# Altium PCB MergeBoard2.PcbDoc
Units mil, origin at the board's own origin, x right, y up, seen from the top; angles counter-clockwise.
Board outline 2500 x 3000 mil, 4 copper layers (Top Layer, Internal Plane 2, InternalPlane1, Bottom Layer); 109 components, 67 nets, 354 pads, 48 vias.
Unrouted connection lines stored in the file: 86.
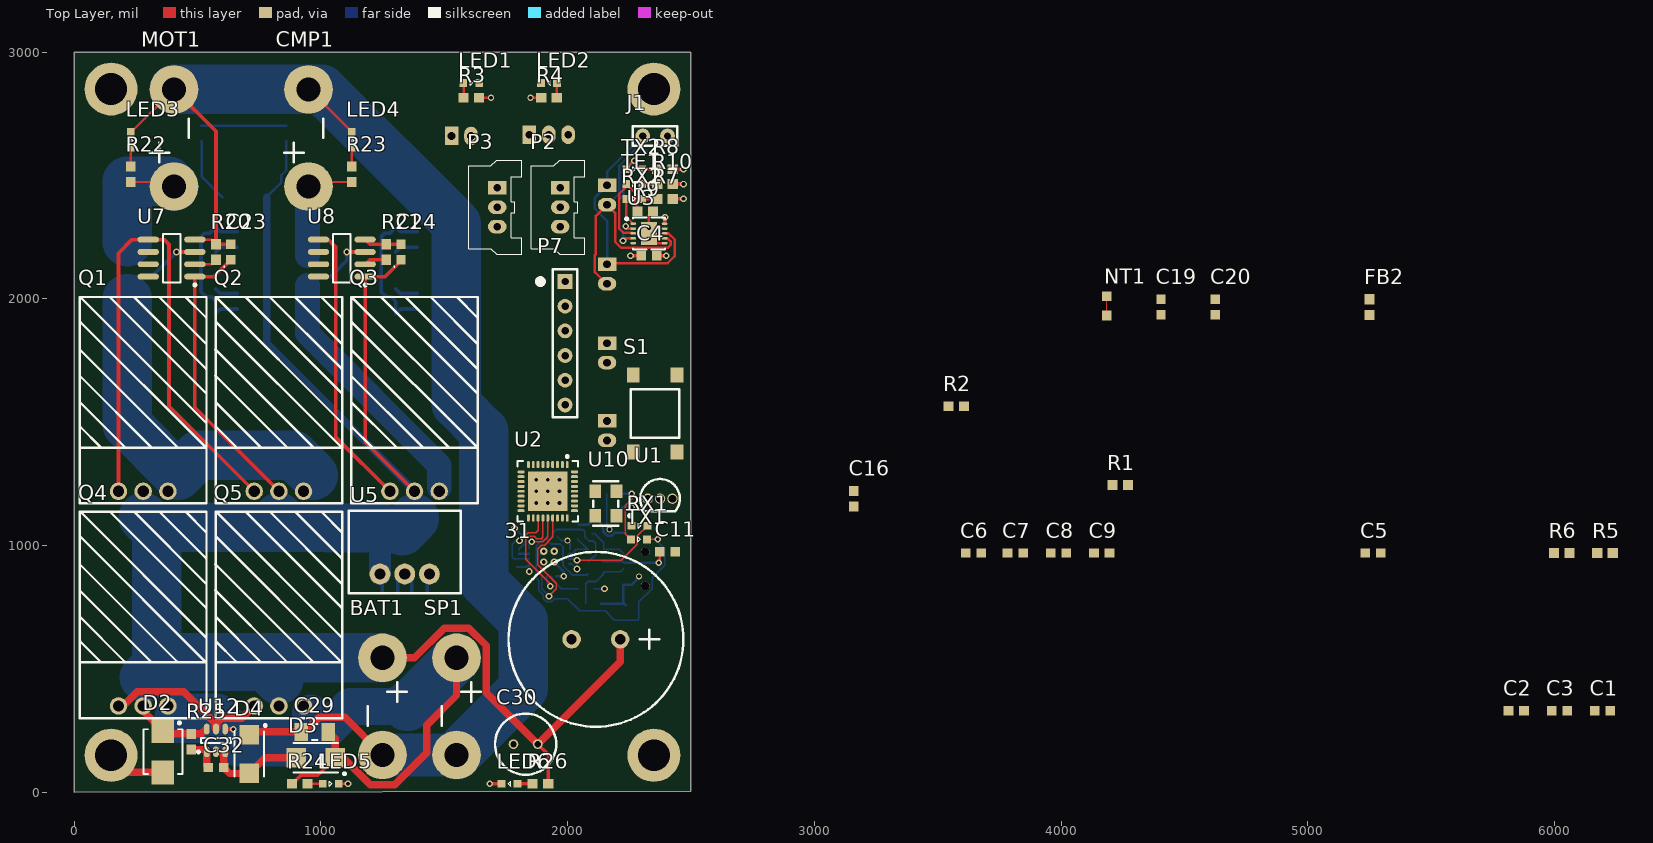
[diagram p0: Top Layer view]
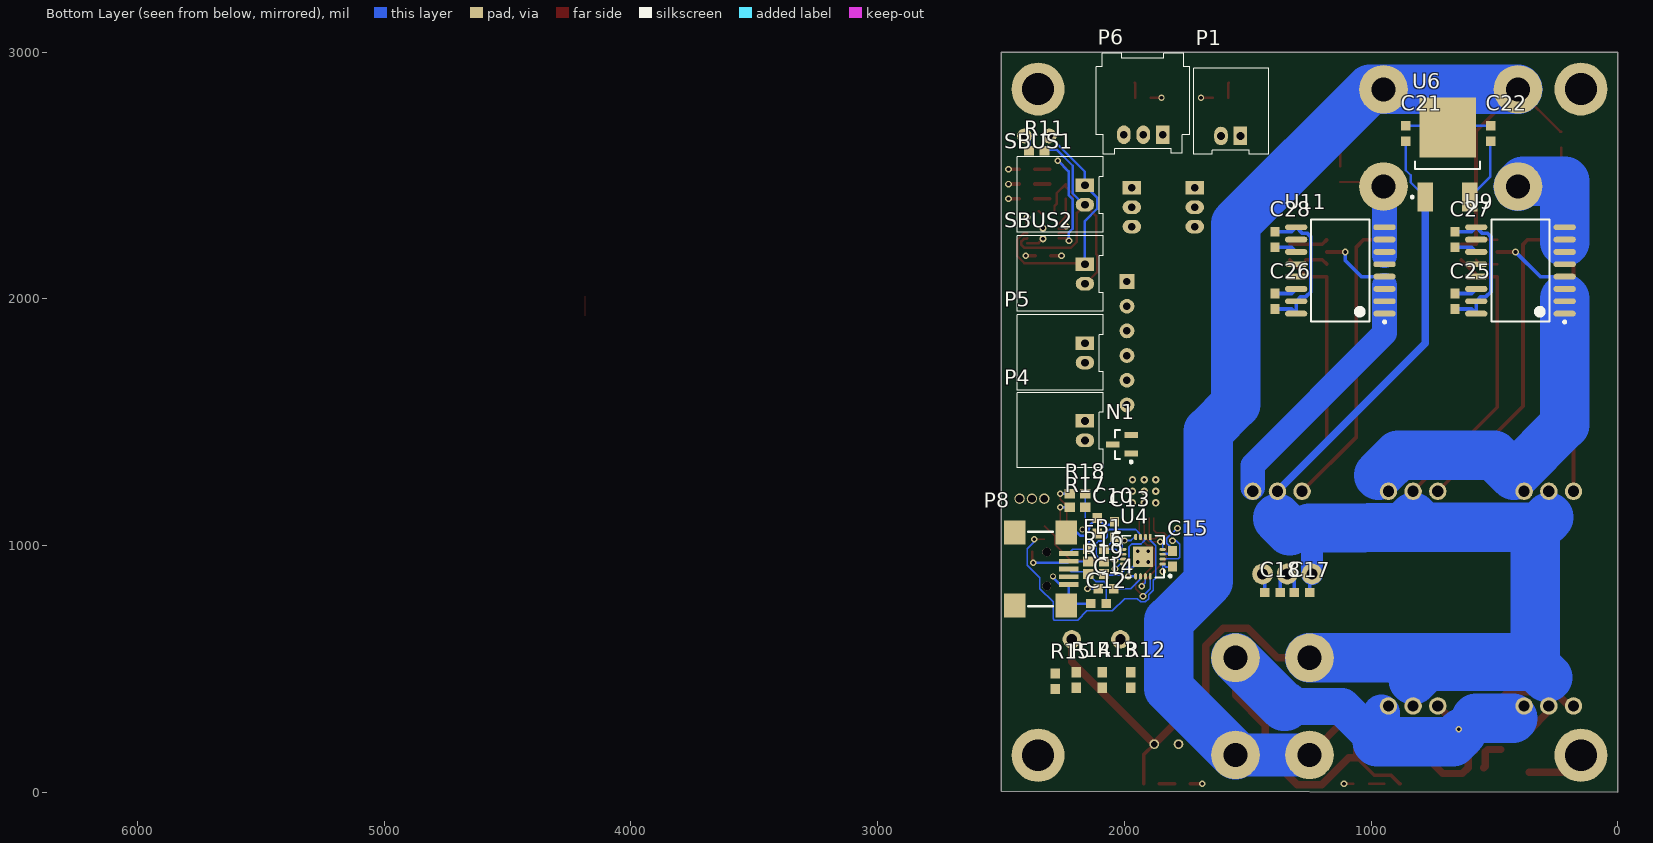
[diagram p1: Bottom Layer view, seen from below]
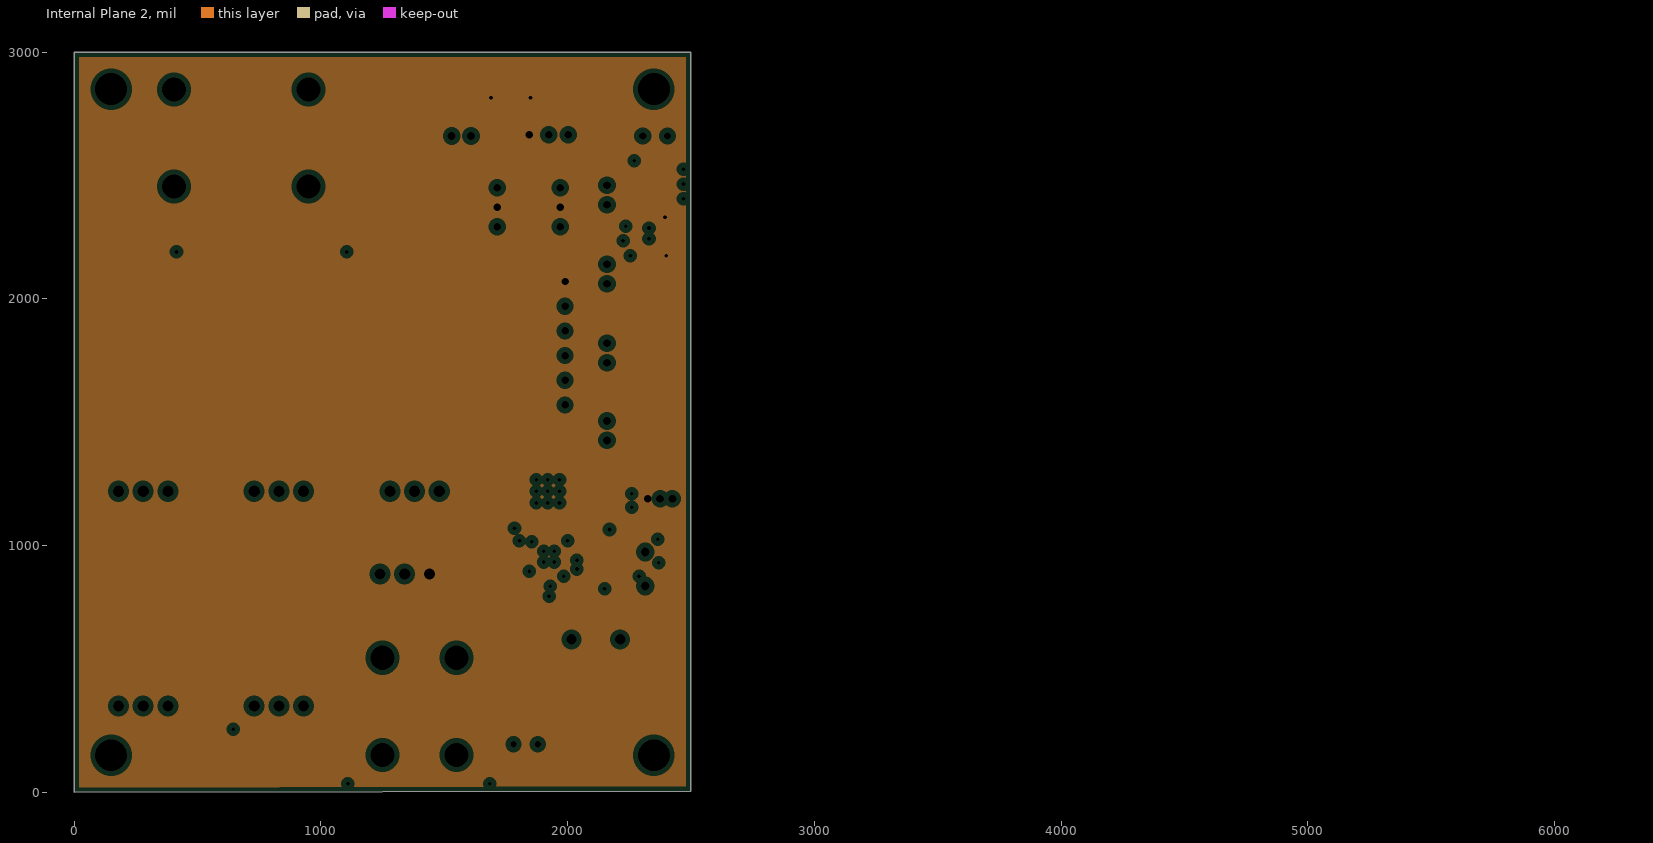
[diagram p2: Internal Plane 2, clearances drawn from the general rule]
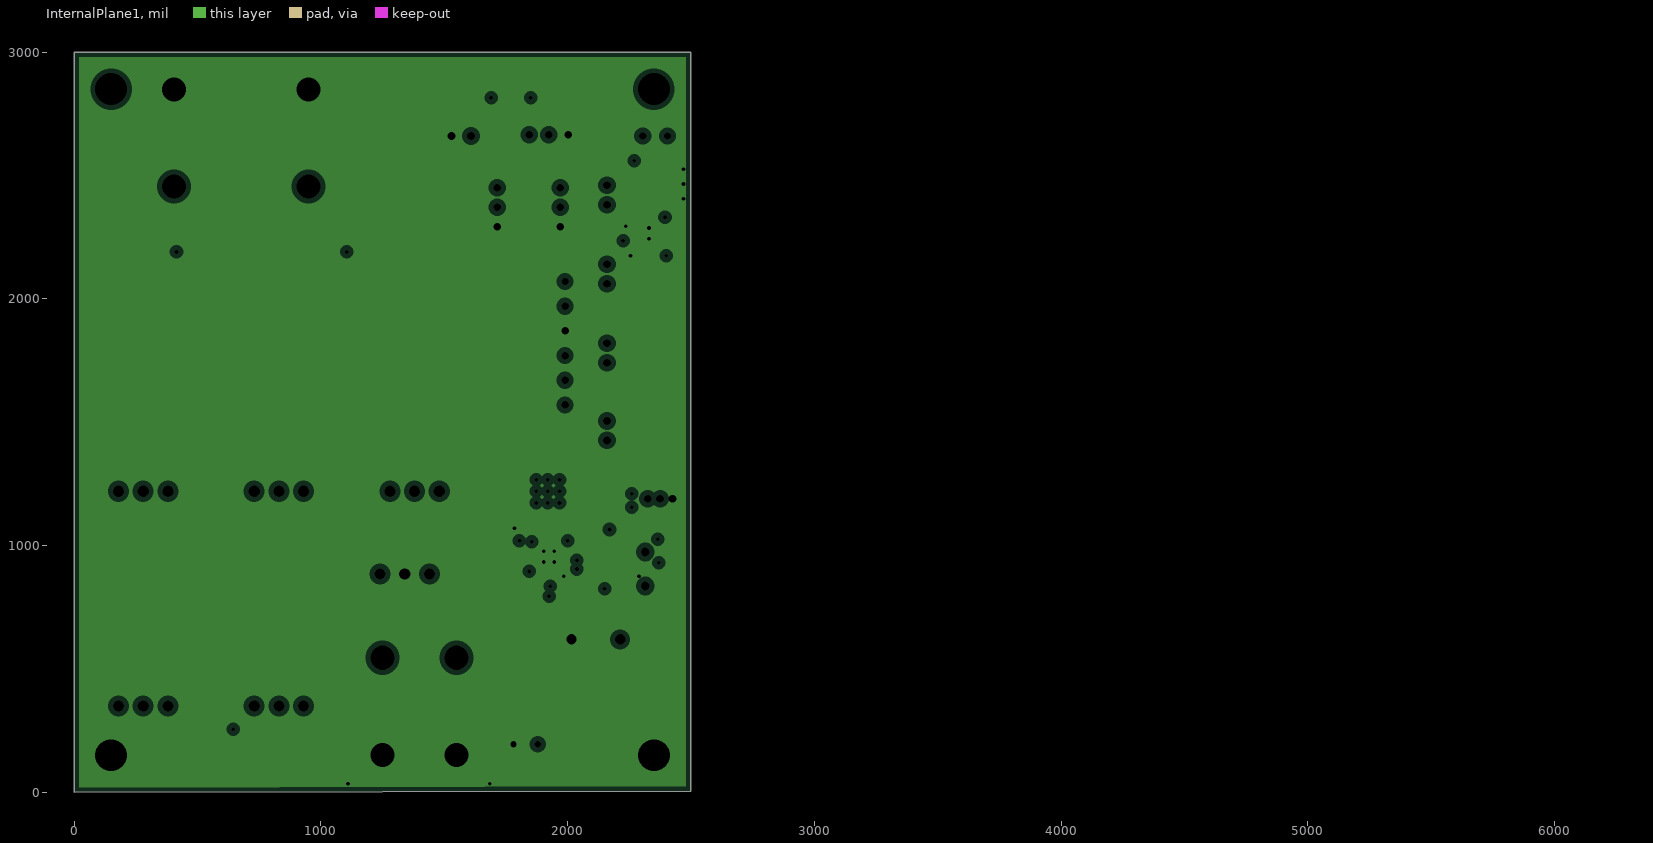
[diagram p3: InternalPlane1, clearances drawn from the general rule]

## Layer stack, top to bottom
Top Layer: signal copper 1.4
Dielectric: core 12.6, FR-4, Dk 4.8
Internal Plane 2: plane copper 1.4, net 3V3
Dielectric: prepreg 12.6, FR-4, Dk 4.8
InternalPlane1: plane copper 1.4, net GND
Dielectric: core 12.6, FR-4, Dk 4.8
Bottom Layer: signal copper 1.4

## Board outline
0,0 2500,5 2500,3000 0,3000

## Design rules (kind name [scope] priority, off if disabled: settings)
Clearance [All] p1: gap=7
HoleSize [All] p1: absolutevalues=TRUE maxlimit=100 minlimit=15 maxpercent=80.000 minpercent=20.000
MinimumSolderMaskSliver [All] p1: minsoldermaskwidth=7
PlaneClearance [All] p1: clearance=20
PlaneConnect [All] p1: planeconnectstyle=Relief reliefexpansion=20 reliefentries=4 reliefconductorwidth=10 reliefairgap=10
PolygonConnect [All] p1: connectstyle=Direct reliefconductorwidth=10 reliefentries=4 polygonreliefangle="90 Angle" airgapwidth=10
RoutingVias [All] p1: holewidth=15 width=27 viastyle="Through Hole" minholewidth=15 minwidth=50 maxholewidth=28 maxwidth=50
SilkscreenOverComponentPads [All] p1: minsilkscreentomaskgap=10
SolderMaskExpansion [All] p1: expansion=4
SolderMaskExpansion Blob [InNetClass('Blob')] p2: expansion=-25
Width [All] p1: maxlimit=300 minlimit=6 preferedwidth=10
23 further rules are at their usual default settings.

## Classes and differential pairs
net class Blob: MOTORS MT_PW RAIL+ SHORE+
component class "Rail Station": 31 BAT1 C29 C30 C32 D2 D3 D4 LED5 LED6 Q4 Q5 R24 R25 R26 SP1 U12
component class Power: C17 C18 C19 C20 C21 C22 FB2 NT1 U5 U6
component class PowerSplitter: C23 C24 C25 C26 C27 C28 CMP1 LED3 LED4 MOT1 Q1 Q2 Q3 R20 R21 R22 R23 U7 U8 U9 U11
component class CPU: C4 C5 C6 C7 C8 C9 C10 C11 C12 C13 C14 C15 C16 FB1 J1 LED1 LED2 P7 P8 R3 R4 R5 R6 R7 R8 R9 R10 R11 R12 R13 R14 R15 R17 R18 R19 RX1 RX2 S1 SBUS1 SBUS2 TE1 TE2 TX1 TX2 U2 U3 U4 U10
component class Attachments: C1 C2 C3 N1 P1 P2 P3 P4 P5 P6 R1 R2 U1

## Components (designator, comment, footprint, x,y, rotation, side; value= is the part's Value field where it differs from the comment)
31 "CapPol" CAP1000uF 2115,620 r180 top
BAT1 "BATWIRE" BATWIRE12 1250,545 r270 top
C1 "Cap" CAPC0603 6195,330 r0 top
C2 "Cap" CAPC0603 5845,330 r0 top
C3 "Cap" CAPC0603 6020,330 r0 top
C4 "Cap" CAPC0603 2330,2175 r0 top
C5 "Cap" CAPC0603 5265,970 r0 top
C6 "Cap" CAPC0603 3645,970 r0 top
C7 "Cap" CAPC0603 3815,970 r0 top
C8 "Cap" CAPC0603 3990,970 r0 top
C9 "Cap" CAPC0603 4165,970 r0 top
C10 "Cap" CAPC0603 2110,1080 r90 bottom
C11 "Cap" CAPC0603 2405,975 r0 top
C12 "Cap" CAPC0603 2105,765 r0 bottom
C13 "Cap" CAPC0603 2040,1065 r90 bottom
C14 "Cap" CAPC0603 2075,825 r0 bottom
C15 "Cap" CAPC0603 1805,946.81 r90 bottom
C16 "Cap" CAPC0603 3160,1190 r90 top
C17 "Cap" CAPC0603 1280,810 r0 bottom
C18 "Cap" CAPC0603 1400,810 r180 bottom
C19 "Cap" CAPC0603 4405,1966.5 r90 top
C20 "Cap" CAPC0603 4625,1966.5 r90 top
C21 "Cap" CAPC0603 860,2670 r90 bottom
C22 "Cap" CAPC0603 515,2670 r90 bottom
C23 "CapPol" CAPP0603 635,2190 r90 top
C24 "CapPol" CAPP0603 1325,2190 r90 top
C25 "Cap" CAPC0603 660,1990 r270 bottom
C26 "Cap" CAPC0603 1390,1990 r270 bottom
C27 "Cap" CAPC0603 660,2240 r90 bottom
C28 "Cap" CAPC0603 1390,2240 r90 bottom
C29 "Cap" CAPC1206 975,245 r180 top
C30 "CapPol" CAP22uF100V 1830,195 r180 top
C32 "Cap" CAPC0603 575,100 r0 top
CMP1 "BATWIRE" BATWIRE12 950,2455 r90 top
D2 "SMBJ60A-13-F" SMBJ60A-13-F 360,165 r270 top
D3 "SS16T3G" SS16T3G 980,140 r180 top
D4 "SS16T3G" SS16T3G 710,155 r270 top
FB1 "FBead" RES0603 2115,985 r0 bottom
FB2 "FBead" RES0603 5250,1966.5 r90 top
J1 "Jumper" HEADER_MALE_1X2 2405,2660 r180 top
LED1 "LED" LED0603 1610,2875 r0 top
LED2 "LED" LED0603 1925,2875 r180 top
LED3 "LED" LED0603 230,2645 r90 top
LED4 "LED" LED0603 1125,2645 r90 top
LED5 "LED" LED0603 1040,35 r0 top
LED6 "LED" LED0603 1765,35 r180 top
MOT1 "BATWIRE" BATWIRE12 405,2455 r90 top
N1 "NMOSFET" 2N7002P,215 2010,1410 r0 bottom
NT1 "NetTie" NT_5mil 4185,1971.5 r90 top net-tie
P1 "2-pin Horz Sherlock" MOLEX-HDR-1X2-SHERLOCK-HORZ 1530,2660 r180 bottom
P2 "MOLEX-HDR-1x3-SHERLOCK_VERT" MOLEX-HDR-1X3-SHERLOCK-VERT 1970,2450 r90 top
P3 "MOLEX-HDR-1x3-SHERLOCK_VERT" MOLEX-HDR-1X3-SHERLOCK-VERT 1715,2450 r90 top
P4 "2-pin Horz Sherlock" MOLEX-HDR-1X2-SHERLOCK-HORZ 2160,1505 r90 bottom
P5 "2-pin Horz Sherlock" MOLEX-HDR-1X2-SHERLOCK-HORZ 2160,1820 r90 bottom
P6 "3pos RA sherlock connector" MOLEX-HDR-1X3-SHERLOCK-RA 1845,2665 r180 bottom
P7 "SWD" SWD_STM32 1990,2070 r0 top
P8 "UX60-MB-5ST" UX60-MB-5ST 2315,905 r270 bottom
Q1 "IRFB3306PbF" "TO-220AB Heatsink" 280,1220 r0 top
Q2 "IRFB3306PbF" "TO-220AB Heatsink" 830,1220 r0 top
Q3 "IRFB3306PbF" "TO-220AB Heatsink" 1380,1220 r0 top
Q4 "IRFB3306PbF" "TO-220AB Heatsink" 280,350 r0 top
Q5 "IRFB3306PbF" "TO-220AB Heatsink" 830,350 r0 top
R1 "Res" RES0603 4240,1245 r0 top
R2 "Res" RES0603 3575,1565 r0 top
R3 "Res" RES0603 1610,2815 r180 top
R4 "Res" RES0603 1925,2815 r0 top
R5 "Res" RES0603 6205,970 r0 top
R6 "Res" RES0603 6030,970 r0 top
R7 "Res" RES0603 2395,2405 r0 top
R8 "Res" RES0603 2395,2525 r0 top
R9 "Res" RES0603 2315,2355 r0 top
R10 "Res" RES0603 2395,2465 r0 top
R11 "Res" RES0603 2355,2600 r180 bottom
R12 "Res" RES0603 1975,455 r270 bottom
R13 "Res" RES0603 2090,455 r270 bottom
R14 "Res" RES0603 2195,455 r270 bottom
R15 "Res" RES0603 2280,450 r270 bottom
R16 "Res" RES0603 2115,935 r180 bottom
R17 "Res" RES0603 2190,1155 r0 bottom
R18 "Res" RES0603 2190,1210 r0 bottom
R19 "Res" RES0603 2115,885 r180 bottom
R20 "Res" RES0603 575,2190 r90 top
R21 "Res" RES0603 1265,2190 r90 top
R22 "Res" RES0603 230,2505 r90 top
R23 "Res" RES0603 1125,2505 r90 top
R24 "Res" RES0603 915,35 r0 top
R25 "Res" RES0603 475,205 r270 top
R26 "Res" RES0603 1890,35 r180 top
RX1 "LED" LED0603 2292,1080 r0 top
RX2 "LED" LED0603 2270,2405 r0 top
S1 "Button" PTS645xxxxSMTR92 2355,1535 r90 top
SBUS1 "2-pin Horz Sherlock" MOLEX-HDR-1X2-SHERLOCK-HORZ 2160,2460 r90 bottom
SBUS2 "2-pin Horz Sherlock" MOLEX-HDR-1X2-SHERLOCK-HORZ 2160,2140 r90 bottom
SP1 "BATWIRE" BATWIRE12 1550,545 r270 top
TE1 "LED" LED0603 2270,2465 r0 top
TX1 "LED" LED0603 2290,1025 r0 top
TX2 "LED" LED0603 2270,2525 r0 top
U1 "MCP9701" MCP970x-E/TO 2375,1190 r0 top
U2 "STM32F103TBU6" STM32F103TBU6 1920,1220 r270 top
U3 "ISL3179EFRZ" ISL3179EFRZ 2330,2265 r0 top
U4 "FT230XQ-T" FT230XQ-T 1925,955 r0 bottom
U5 "R-78C3.3-1.0" R-78C3.3-1.0 1240,885 r0 top
U6 "MC78M12CDTG" MC78M12CDTG 690,2585 r90 bottom
U7 "MIC5011" MIC5011 395,2165 r180 top
U8 "MIC5011" MIC5011 1085,2165 r180 top
U9 "ACS710" ACS710 395,2115 r0 bottom
U10 "636L3C008M" 636L3C 2155,1170 r90 top
U11 "ACS710" ACS710 1125,2115 r0 bottom
U12 "LM5050-1" LM5050 575,210 r90 top

## Footprints (in the part's own frame and the unit in brackets; to place one, negate y for a bottom-side part, rotate by r counter-clockwise, add the part's x,y. Pads: shape width x height; smd on the part's side, far side on the other; paste and mask are expansions set on the pad)
2N7002P,215 [mm] "MOSFET N-CH SGL 60V SOT-23"
  rect 1.4x0.6 smd: 1(-0.95,0.95) 2(-0.95,-0.95) 3(0.95,0)
  silkscreen extent -1.07,-1.5 0.7,1.92, body extent -0.7,-1.5 0.7,1.5, height 1.1
636L3C [mm]
  rect 1.4x1.2 smd: 1(-1.27,-1.1) 2(1.27,-1.1) 3(1.27,1.1) 4(-1.27,1.1)
  silkscreen extent -2.3,-2.65 2.3,1.3, body extent -2.5,-1.6 2.5,1.6, height 2
ACS710 [mm] "SOIC, 16-Leads, Body 10.5x7.6mm (max), Pitch 1.27mm, IPC Medium Density"
  oval 2.3x0.6 smd: 1(-4.55,4.445) 2(-4.55,3.175) 3(-4.55,1.905) 4(-4.55,0.635) 5(-4.55,-0.635) 6(-4.55,-1.905) 7(-4.55,-3.175) 8(-4.55,-4.445) 9(4.55,-4.445) 10(4.55,-3.175) 11(4.55,-1.905) 12(4.55,-0.635) 13(4.55,0.635) 14(4.55,1.905) 15(4.55,3.175) 16(4.55,4.445)
  silkscreen extent -4.67,-5.25 3,5.42, body extent -3.8,-5.25 3.8,5.25, height 2.65
BATWIRE12 [mm] "Two 12AWG wires soldered directly to the board"
  round 5 hole 2.5: +(0,0) -(10,0)
  silkscreen extent 2.5,-1.5 7,2.5
CAP22uF100V [mm] "CAP ALUM 22UF 100V 20% RADIAL"
  round 1 hole 0.65: 1(-1.25,0) 2(1.25,0)
  silkscreen extent -3.15,-3.15 3.15,3.15, body extent -3.12,-3.14 3.15,3.14, height 11.2
CAP1000uF [mm] "CAP ALUM 1000UF 50V 20% RADIAL"
  round 1.9 hole 1.05: 1(-2.5,0) 2(2.5,0)
  silkscreen extent -9,-9 9,9, body extent -8.93,-8.98 9,8.98, height 20
CAPC0603 [mm] "Chip Capacitor, 2-Leads, Body 1.60x0.80mm, IPC Medium Density"
  rect 1x0.95 smd: 1(-0.8,0) 2(0.8,0)
  body extent -0.88,-0.48 0.87,0.48, height 0.8
CAPC1206 [mm] "Chip Capacitor, 2-Leads, Body 3.20x1.60mm, IPC Medium Density"
  rect 1.4x1.85 smd: 1(-1.4,0) 2(1.4,0)
  silkscreen extent -0.3,-0.82 0.3,0.82, body extent -1.7,-0.9 1.7,0.9, height 1.8
CAPP0603 [mm] "Chip Capacitor, 2-Leads, Body 1.60x0.80mm, IPC Medium Density"
  rect 1x0.95 smd: 1(-0.8,0) 2(0.8,0)
  silkscreen extent -1.56,0.64 -1.46,0.74, body extent -0.88,-0.48 0.87,0.48, height 0.8
FT230XQ-T [mm] "IC USB SERIAL BASIC UART 16QFN"
  oval 0.65x0.3 smd mask+0.07: 1(-2.025,0.75) 2(-2.025,0.25) 3(-2.025,-0.25) 4(-2.025,-0.75) 9(2.025,-0.75) 10(2.025,-0.25) 11(2.025,0.25) 12(2.025,0.75)
  oval 0.3x0.65 smd mask+0.07: 5(-0.75,-2.025) 6(-0.25,-2.025) 7(0.25,-2.025) 8(0.75,-2.025) 13(0.75,2.025) 14(0.25,2.025) 15(-0.25,2.025) 16(-0.75,2.025)
  rect 2.08x2.08 smd mask+0.07: 13(0,0)
  silkscreen extent -2.92,-2.15 2.15,2.15, body extent -2,-2 2,2, height 0.8
HEADER_MALE_1X2 [mil]
  round 60 hole 30: 1(0,0) 2(100,0)
  silkscreen extent -40,-40 140,40
ISL3179EFRZ [mm] "TXRX ESD 3.3V RS-485/422 10-DFN"
  oval 0.6x0.25 smd mask+0.07: 1(-1.615,1) 2(-1.615,0.5) 3(-1.615,0) 4(-1.615,-0.5) 5(-1.615,-1) 6(1.615,-1) 7(1.615,-0.5) 8(1.615,0) 9(1.615,0.5) 10(1.615,1)
  rect 1.64x2.38 smd mask+0.07: 6(0,0)
  silkscreen extent -2.42,-1.65 1.65,1.65, body extent -1.5,-1.5 1.5,1.5, height 0.9
LED0603 [mm] "Chip LED, 2-Leads, Body 1.60x0.80mm, IPC Medium Density"
  rect 0.8x0.8 smd: A(-0.825,0) C(0.825,0)
  silkscreen extent -0.13,-0.25 0.12,0.25, body extent -0.88,-0.48 0.87,0.47, height 0.8
LM5050 [mm] "SOT23, 6-Leads, Body 2.90x2.80mm, Pitch 0.95mm, IPC Medium Density"
  oval 1.1x0.6 smd: 1(-1.175,0.95) 2(-1.175,0) 3(-1.175,-0.95) 4(1.175,-0.95) 5(1.175,0) 6(1.175,0.95)
  silkscreen extent -1.3,-1.55 0.25,1.92, body extent -0.87,-1.52 0.88,1.53, height 1.1
MC78M12CDTG [mm] "IC REG LDO 12V 0.5A DPAK"
  rect 3x1.6 smd: 1(-4.39,2.29) 3(-4.39,-2.29)
  rect 6.2x5.8 smd: 2(2.79,0)
  silkscreen extent -4.51,-3.35 -0.71,3.77, body extent -1.5,-3.37 4.72,3.37, height 2.38
MCP970x-E/TO [mil] "Low-Power Linear Active Thermistor ICs"
  round 42 hole 31.5: 1(-50,0) 2(0,0) 3(50,0)
  silkscreen extent -80,-51 80,80, body extent -92,-92 93,92, height 209
MIC5011 [mm] "SOIC, 8-Leads, Body 4.90x3.90mm, Pitch 1.27mm, IPC Medium Density"
  oval 2.2x0.6 smd: 1(-2.4,1.905) 2(-2.4,0.635) 3(-2.4,-0.635) 4(-2.4,-1.905) 5(2.4,-1.905) 6(2.4,-0.635) 7(2.4,0.635) 8(2.4,1.905)
  silkscreen extent -2.53,-2.5 0.9,2.88, body extent -2,-2.5 2,2.5, height 1.63
MOLEX-HDR-1X2-SHERLOCK-HORZ [mm]
  rect 1.397x1.905 hole 0.8: 1(0,0)
  oval 1.397x1.905 hole 0.8: 2(-2,0)
  silkscreen extent -4.83,-1.91 2.92,6.98, body extent -4.83,-1.91 2.87,8.59, height 5.54
MOLEX-HDR-1X3-SHERLOCK-RA [mm]
  rect 1.397x1.905 hole 0.8: 1(0,0)
  oval 1.397x1.905 hole 0.8: 2(-2,0) 3(-4,0)
  silkscreen extent -6.86,-2.03 2.79,8.38, body extent -6.88,-1.99 2.82,8.51, height 5.75
MOLEX-HDR-1X3-SHERLOCK-VERT [mm]
  rect 1.397x1.905 hole 0.8: 1(0,0)
  oval 1.397x1.905 hole 0.8: 2(-2,0) 3(-4,0)
  silkscreen extent -6.85,-2.55 2.85,2.95, body extent -6.88,-2.57 2.82,2.98, height 8.57
NT_5mil [mm] "Thin Net Tie"
  rect 1x1 smd paste+0 mask+0: 1(-1,0) 2(1,0)
  Top Layer lines w0.127: -1,0 1,0
PTS645xxxxSMTR92 [mm] "PTS645 Series SMT 6 mm Tactile Switch"
  rect 1.555x1.3 smd: A(-3.975,2.25) A(3.975,2.25) B(-3.975,-2.25) B(3.975,-2.25)
  silkscreen extent -2.5,-2.5 2.5,2.5, body extent -3,-3 3,3, height 4.5
R-78C3.3-1.0 [mm] "CONV DC/DC 1A 3.3V OUT SIP VERT"
  round 2.15 hole 1.15: 1(0,0) 2(2.54,0) 3(5.08,0)
  silkscreen extent -3.21,-2 8.29,6.5, body extent -3.3,-2.03 8.38,6.6, height 10.4
RES0603 [mm] "Chip Resistor, 2-Leads, Body 1.60x0.80mm, IPC Medium Density"
  rect 1.05x1 smd: 1(-0.8,0) 2(0.8,0)
  body extent -0.88,-0.48 0.87,0.47, height 0.8
SMBJ60A-13-F [mm] "TVS UNIDIRECT 600W 60V SMB"
  rect 2.5x2.3 smd: A(2.15,0) C(-2.15,0)
  silkscreen extent -3.07,-2 2.3,2, body extent -2.29,-1.97 2.28,1.97, height 2.62
SS16T3G [mm] "DIODE SCHOTTKY 60V 1A SMA"
  rect 2x2 smd: A(2,0) C(-2,0)
  silkscreen extent -3.08,-1.5 2.3,1.77, body extent -2.29,-1.46 2.28,1.46, height 2.2
STM32F103TBU6 [mm] "MCU ARM 32BIT 128KB 36VFQFPN"
  oval 0.75x0.3 smd mask+0.07: 1(-2.75,2) 2(-2.75,1.5) 3(-2.75,1) 4(-2.75,0.5) 5(-2.75,0) 6(-2.75,-0.5) 7(-2.75,-1) 8(-2.75,-1.5) 9(-2.75,-2) 19(2.75,-2) 20(2.75,-1.5) 21(2.75,-1) 22(2.75,-0.5) 23(2.75,0) 24(2.75,0.5) 25(2.75,1) 26(2.75,1.5) 27(2.75,2)
  oval 0.3x0.75 smd mask+0.07: 10(-2,-2.75) 11(-1.5,-2.75) 12(-1,-2.75) 13(-0.5,-2.75) 14(0,-2.75) 15(0.5,-2.75) 16(1,-2.75) 17(1.5,-2.75) 18(2,-2.75) 28(2,2.75) 29(1.5,2.75) 30(1,2.75) 31(0.5,2.75) 32(0,2.75) 33(-0.5,2.75) 34(-1,2.75) 35(-1.5,2.75) 36(-2,2.75)
  rect 4.1x4.1 smd mask+0.07: 37(0,0)
  silkscreen extent -3.7,-3.1 3.1,3.1, body extent -3.06,-3.06 3.06,3.06, height 1
SWD_STM32 [mil] "SWD connector matching the pinout on STM Discovery Boards"
  rect 60x60 hole 30: 1(0,0)
  round 60 hole 30: 2(0,-100) 3(0,-200) 4(0,-300) 5(0,-400) 6(0,-500)
  silkscreen extent -110,-550 50,50
"TO-220AB Heatsink" [mm] "HEXFET Power MOSFET w/ Heat Sink"
  round 1.8 hole 1.15: D(0,0) G(-2.54,0) S(2.54,0)
  silkscreen extent -6.53,-1.25 6.52,20, body extent -6.44,-0.15 6.36,19.9, height 12.7
UX60-MB-5ST [mm] "USB Mini-B Recepticle"
  rect 0.5x2 smd: 1(-1.6,2.25) 2(-0.8,2.25) 3(0,2.25) 4(0.8,2.25) 5(1.6,2.25)
  rect 2.5x2.2 smd: SHD(-3.75,-3.3) SHD(-3.75,2) SHD(3.75,-3.3) SHD(3.75,2)
  round 0.9 hole 0.9 unplated: ""(-1.75,0) ""(1.75,0)
  silkscreen extent -3.85,-1.92 3.85,0.63

## Part data
BAT1 CMP1 MOT1 SP1: "Two large gauge leads soldered directly to the board."
D2: "TVS UNIDIRECT 600W 60V SMB"
D3 D4: "DIODE SCHOTTKY 60V 1A SMA"
FB1 FB2: "Ferrite Bead"
J1: "Single Jumper on 1x2 Male Header"
N1: "NMOSFET Template"
NT1: "Ties two nets together"
P1 P4 P5 SBUS1 SBUS2: library part MOLEX-HDR-1x2-SHERLOCK_RA, "Header, Molex, 2mm Pitch Sherlock Header, Single Row, Horizontal, 2 Circuits, Length 3.3mm,  0353630260"
P2 P3: "Header, Molex, 2mm Pitch Sherlock Header, Single Row, Vertical, 3 Circuits, Length 3.3mm, 0353620376"
P6: library part MOLEX-HDR-1x3-SHERLOCK_RA, "Header, Molex, 2mm Pitch Sherlock Header, Single Row, Right Angle 3 Circuits, Length 3.3mm"
P7: library part SWD_STM32, "SWD connector matching the pinout on STM Discovery Boards"
P8: "USB Mini B Metal Shield SMT Type With Positioning Post"
Q1 Q2 Q3 Q4 Q5: library part IRFx3306PbF, "HEXFET Power MOSFET"
S1: "SPST Button"
U1: library part MCP970x, "Low-Power Linear Active Thermistor ICs"
U2: "MCU ARM 32BIT 32K FLASH 36VFQFP"
U3: "TXRX ESD 3.3V RS-485/422 10-DFN"
U4: "IC USB SERIAL BASIC UART 16QFN"
U5: "CONV DC/DC 1A 3.3V OUT SIP VERT"
U6: "IC REG LDO 12V 0.5A DPAK"
U7 U8: "Minimum Parts High- or Low-Side MOSFET Driver"
U9 U11: "Current Sensor with Integrated Overcurrent Detection"
U10: library part 636L3C, "HCMOS/TTL Clock Oscillator"
U12: library part LM5050, "High-Side OR-ing FET Controller"

## Free pads (board coordinates)
  round 215 hole 128.5: 1(150,150) 1(150,2850) 1(2350,150) 1(2350,2850)

## Via types
v1: diameter 27, hole 15, Top Layer to Bottom Layer, 27 vias
v2: diameter 30, hole 15, Top Layer to Bottom Layer, tented top, 9 vias
v3: diameter 30, hole 15, Top Layer to Bottom Layer, 6 vias
v4: diameter 25, hole 15, Top Layer to Bottom Layer, 6 vias

## Nets (pads, with @x,y where several pads share a name; then routed paths per layer and width w, separated by ;. In a path a pad name is that pad's centre, name@x,y a point inside that pad or via, vN(x,y) a via of type N, cw(c..) or ccw(c..) an arc to the next point about the centre after c; other vN are vias at no path point)
3V3: C1.2 C2.2 C3.2 C4.2 C6.1 C7.1 C8.1 C9.1 C16.1 C18.1 FB2.2 P2.2 P3.2 P6.1 P7.1 R3.1 R4.1 R6.1 R12.1 R13.1 R14.1 R15.1 U1.1 U2.1 U2.19 U2.27 U3.10 U5.3 U10.1 U10.4 | length 235.3
  Top Layer w10: R3.1 v4(1690,2815) ; v4(1850,2815) R4.1
  Top Layer w15: C4.2 v1(2400,2175) ; U3.10 2393.58,2328.58 v1(2395,2330)
  Bottom Layer w10: U5.3@1431.5,876.5 U5.3
  Bottom Layer w15: C18.1 U5.3@1431.5,876.5
12V: C22.1 P1.2 P4.1 R1.1 U6.3 | length 261.5
  Bottom Layer w10: C22.1 517,2636.5 517,2495.01 U6.3
A3V3: C19.1 C20.1 C25.1 C26.1 FB2.1 U2.6 U9.14 U11.14 | length 187.1
  Bottom Layer w15: U9.14 592.64,2021.5 C25.1 ; U11.14 1322.64,2021.5 C26.1
AGND: C19.2 C20.2 C25.2 C26.2 C27.2 C28.2 NT1.2 U2.5 U9.9 U9.15 U9.16 U11.9 U11.15 U11.16 | length 1221.6
  Bottom Layer w15: C25.2 592.64,1958.5 U9.16 U9.15 555.25,2008.89 534.57,2008.89 514.36,2029.1 514.36,2250.9 529.77,2266.31 550.44,2266.31 U9.9 592.64,2271.5 C27.2 ; C26.2 1322.64,1958.5 U11.16 U11.15 1285.25,2008.89 1264.57,2008.89 1244.36,2029.1 1244.36,2250.9 1259.77,2266.31 1280.44,2266.31 U11.9 1322.64,2271.5 C28.2
BOOT0: R5.1 U2.35 U4.12 | length 41.8
  Bottom Layer w7: U4.12 2017.53,925.47 v1(2038,905)
BUZ_EN: N1.1 R2.1 U2.31
CLK8MHZ: U2.2 U10.3
CM_PW: Q3.S U8.3 U11.1 U11.2 U11.3 U11.4 | length 1336.8
  Top Layer w15: v1(1105,2190) U8.3
  Bottom Layer w15: U11.4 1040,2090 1105,2155 v1(1105,2190)
  Bottom Layer w100: 945.87,2055 U11.3 U11.2 U11.1 945.87,1859.81 1480,1325.67 Q3.S@1480,1235
CMP_EN: R21.1 U2.32 U8.2 | length 93.2
  Top Layer w15: U8.2 1197.99,2158.5 R21.1
CMP_I: U2.12 U11.12
COMP: CMP1.+ R23.1 U11.5 U11.6 U11.7 U11.8 | length 398.5
  Top Layer w10: CMP1.+ 968.5,2473.5 R23.1
  Bottom Layer w100: 945.87,2175 U11.6 U11.7 U11.8 CMP1.+@945.87,2390.87
DEBUG_CTS: R15.2 U2.23 U4.4 | length 184.5
  Top Layer w6: v1(1855,1015) 1900,1015 1920,1035 U2.23
  Bottom Layer w6: U4.4 1845.28,1005.28 v1(1855,1015)
DEBUG_RTS: R14.2 U2.24 U4.16 | length 485.6
  Top Layer w6: v1(1925,795) 1925,796.77 1953.5,825.27 1953.5,847.84 1878.35,922.99 1878.35,987.01 1892.99,1001.65 1906.65,1001.65 1939.68,1034.68 U2.24
  Bottom Layer w6: U4.16 1895.47,824.53 v1(1925,795)
DEBUG_RXI: R12.2 U2.22 U4.15 | length 436.2
  Top Layer w6: U2.22 1900,1111.42 1900,1033.38 1894.62,1028 1875.23,1028 1864.73,1038.5 1845.27,1038.5 1831.5,1024.73 1831.5,943.5 1930,845 v1(1930,835)
  Bottom Layer w6: U4.15 1915.16,849.84 v1(1930,835)
DEBUG_TXO: R13.2 U2.21 U4.2 | length 302.8
  Top Layer w6: v1(1805,1020) 1808.38,1020 1839.88,1051.5 1870.12,1051.5 1880.63,1062.01 U2.21
  Bottom Layer w6: v1(1805,1020) 1790.12,1020 1776.3,1006.18 1776.3,952.67 1782.16,946.81 1843.62,946.81 U4.2
GND: 31.2 BAT1.- C1.1 C2.1 C3.1 C4.1 C5.2 C6.2 C7.2 C8.2 C9.2 C10.2 C11.2 C12.2 C13.2 C15.2 C16.2 C17.2 C18.2 C21.2 C22.2 C23.2 C24.2 C29.2 C30.2 CMP1.- D2.A D4.C LED3.C LED4.C LED5.C LED6.C MOT1.- N1.2 NT1.1 P1.1 P2.3 P3.3 P6.3 P7.3 P8.5 P8.SHD pad.1@150,150 pad.1@2350,150 R2.2 R5.2 R7.2 R8.2 R9.2 R10.2 R20.2 R21.2 S1.A SP1.- U1.3 U2.18 U2.26 U2.36 U3.2 U3.6 U4.3 U4.13 U5.2 U6.2 U7.4 U8.4 U10.2 | length 8240.6
  Top Layer w10: LED3.C 233.78,2677.48 MOT1.- ; U7.4 556.5,2240 R20.2 ; CMP1.- 953.78,2848.7 LED4.C ; LED5.C v1(1110,35) ; v1@2240.31,2284.69 U3.2 ; v3(2330,2243.35) 2347.72,2225.63 U3.6@2393.58,2225.63 ; v3(2330,2286.65) 2330,2338.5 R9.2
  Top Layer w15: MOT1.- 575,2678.7 R20.2 C23.2 ; U8.4 1197.99,2221.5 R21.2 C24.2@1330,2221.5 ; SP1.- SP1.-@1593.7,195 ; v1(1685,35) LED6.C ; v1(2255,2175) C4.1 ; pad.1@2340,140 pad.1@2350,150 ; R7.2 v1(2470,2405) ; R10.2 v1(2470,2465) ; R8.2 v1(2470,2525)
  Top Layer w30: pad.1@150,150 219.65,80.35 D2.A ; D4.C 721.26,245 C29.2 935.03,245 993.45,303.42 1097.88,303.42 BAT1.- ; SP1.- SP1.-@1550,178.43
  Bottom Layer w6: v1(1785,1070) 1811.5,1043.5 1814.73,1043.5 1828.5,1029.73 1828.5,1010.27 1805,986.77 C15.2
  Bottom Layer w10: C22.2 C21.2 ; U5.2@1311.5,856.5 U5.2 U5.2@1368.5,856.5 ; C15.2@1804.87,966.62 U4.3@1843.5,966.62 ; U4.13@1891.54,964.84 v3(1903.35,976.65) ; v3(1946.65,933.35) 1946.65,931.53 1985,893.19 v1(1985,875) 1984.72,875.28 U4.13@1954.53,875.28 ; C13.2@2045,1084.52 2084.85,1084.52 C10.2@2095.33,1095 ; C10.2 2143,1078.49 2143,1070.08 2145.5,1067.58 2145.5,1054.85 2159.85,1040.5 2180.15,1040.5 2192.29,1052.64 P8.SHD@2236.26,1052.64 ; C12.2 P8.SHD@2228.62,765 ; P8.SHD@2236.26,757.36 P8.SHD@2228.62,765 ; v4(2290,875) 2290,870.9 2261.1,842.01 P8.5 2226.42,767.2 P8.SHD@2228.62,765
  Bottom Layer w15: C17.2 U5.2@1311.5,856.5 ; C18.2 U5.2@1368.5,856.5
  Bottom Layer w175: BAT1.- 1250.65,150.65 SP1.-@1549.35,150.65
  Bottom Layer w200: MOT1.- CMP1.- 1004.89,2848.7 1549.35,2304.24 1549.35,1573.25 1660,1462.6 1660,855 1820,695 1820,421.3 SP1.-
  other v1: 2235.31,2294.69
  other v3: 1903.35,933.35 1946.65,976.65
LED1: LED1.C U2.33
LED2: LED2.C U2.34
MOT_EN: R20.1 U2.17 U7.2 | length 93.2
  Top Layer w10: U7.2 556.5,2140 R20.1
MOT_I: U2.11 U9.12
MOTORS: MOT1.+ R22.1 U9.5 U9.6 U9.7 U9.8 | length 626.3
  Top Layer w10: R22.1 386.5,2473.5 MOT1.+
  Bottom Layer w200: U9.7@215.87,2230 U9.7 U9.8 215.87,2475.87 384.13,2475.87 MOT1.+
MT_PW: Q1.S Q2.S U7.3 U9.1 U9.2 U9.3 U9.4 | length 1731.1
  Top Layer w15: v1(415,2190) U7.3
  Bottom Layer w15: U9.4 315,2090 v1(415,2190)
  Bottom Layer w200: U9.2@215.87,2000 U9.2 U9.1 215.87,1489.81 421.11,1284.57 501.97,1365.43 890.24,1365.43 970.12,1285.56
NetC10_1: C10.1 FB1.2 P8.1 | length 170.6
  Bottom Layer w7: C10.1@2100,1043.51 C10.1@2100,1048.5 ; C10.1 2146.5,1012.01 FB1.2
  Bottom Layer w8: FB1.2 2209.41,985 P8.1
NetC11_1: C11.1 P8.2 R16.1 | length 277
  Top Layer w10: v1(2370,930) 2373.5,933.5 C11.1
  Bottom Layer w7: R16.1@2141.5,935 R16.1 P8.2@2224.92,935
  Bottom Layer w10: P8.2@2224.92,935 2229.92,930 v1(2370,930)
NetC12_1: C12.1 P8.3 R19.1 | length 262.9
  Bottom Layer w7: C12.1 2073.69,765.19 2073.69,845.43 2082.46,854.2 2115.7,854.2 R19.1 ; R19.1@2141.5,885 2150.34,893.85 2215.26,893.85 P8.3
NetC13_1: C13.1 FB1.1 U4.10 | length 145.9
  Bottom Layer w7: C13.1@2040,1026.52 FB1.1@2081.52,985
  Bottom Layer w8: U4.10 2007.5,967.62 2018.62,967.62 2035.99,985 2081.52,985 FB1.1
NetC14_1: C14.1 U4.14 | length 135.6
  Bottom Layer w7: U4.14 1938.12,872 1938.12,861.59 1974.71,825 C14.1
NetC27_1: C27.1 U9.11 | length 93.5
  Bottom Layer w15: U9.11 592.64,2208.5 C27.1
NetC28_1: C28.1 U11.11 | length 93.5
  Bottom Layer w15: U11.11 1322.64,2208.5 C28.1
NetC32_1: C32.1 R25.2 U12.1 | length 132.8
  Top Layer w30: R25.2 527.83,173.5 U12.1 537.6,105.91 C32.1
NetC32_2: C32.2 D3.A D4.A U12.2 U12.3 | length 434.6
  Top Layer w15: U12.2 U12.3
  Top Layer w30: U12.3 606.5,157.83 C32.2 630.24,76.26 D4.A 773.74,140 D3.A
NetJ1_1: J1.1 R11.1 | length 72.7
  Bottom Layer w10: R11.1@2386.5,2595 2386.5,2641.5 J1.1
NetJ1_2: J1.2 SBUS1.1 SBUS2.1 U3.8 | length 1026.9
  Top Layer w10: SBUS2.1 2164.3,2144.3 2405.36,2144.3 2434.39,2173.33 2434.39,2239.68 2409.07,2265 U3.8
  Bottom Layer w10: SBUS2.1 2160,2315.4 2110.5,2364.9 2110.5,2410.5 SBUS1.1 2160,2515 J1.2
NetLED1_A: LED1.A R3.2 | length 60.4
  Top Layer w10: LED1.A 1578.5,2874.02 R3.2
NetLED2_A: LED2.A R4.2 | length 60.4
  Top Layer w10: R4.2 1956.5,2874.02 LED2.A
NetLED3_A: LED3.A R22.2 | length 76
  Top Layer w10: R22.2 LED3.A
NetLED4_A: LED4.A R23.2 | length 76
  Top Layer w10: R23.2 LED4.A
NetLED5_A: LED5.A R24.2 | length 61
  Top Layer w10: R24.2 LED5.A
NetLED6_A: LED6.A R26.2 | length 61
  Top Layer w15: LED6.A R26.2
NetN1_3: N1.3 P4.2 R1.2
NetQ1_G: Q1.G Q2.G U7.5 | length 2344
  Top Layer w15: Q1.G 180,2185 235,2240 U7.5 365,2240 385,2220 385,1565 Q2.G
NetQ3_G: Q3.G U8.5 | length 1163
  Top Layer w15: U8.5 1030,2240 1060,2210 1060,1440 Q3.G
NetQ4_G: Q4.G Q5.G U12.5 | length 709.6
  Top Layer w15: Q4.G 198.78,350 Q4.G@209.38,350
  Top Layer w30: Q4.G@198.78,350 256.21,407.43 444.08,407.43 571.41,280.11 571.41,259.85 U12.5 578.59,259.85 578.59,280.11 598.4,299.91 679.91,299.91 Q5.G
NetR7_1: R7.1 RX2.C | length 61
  Top Layer w15: RX2.C R7.1
NetR8_1: R8.1 TX2.C | length 61
  Top Layer w15: TX2.C R8.1
NetR10_1: R10.1 TE1.C | length 61
  Top Layer w15: TE1.C R10.1
NetR11_2: R11.2 SBUS1.2 SBUS2.2 U3.7 | length 1135.7
  Top Layer w10: SBUS2.2 2156.77,2061.26 2110.5,2107.53 2110.5,2176.97 2115,2181.47 2115,2336.26 SBUS1.2 2192.77,2348.49 2192.77,2231.17 2217.79,2206.15 2404.92,2206.15 2417.39,2218.62 2417.39,2232.64 2407.4,2242.63 2396.27,2242.63 U3.7
  Bottom Layer w10: SBUS1.2 2163.23,2381.26 2209.5,2427.53 2209.5,2539.5 2275,2605 2313.5,2605 R11.2@2323.5,2595
NetR16_2: R16.2 U4.7 | length 324
  Bottom Layer w7: U4.7 1938.12,1038 1938.12,1048.41 1954.71,1065 2061.74,1065 2069.2,1057.54 2069.2,1036.07 2086.95,1018.32 2105.39,1018.32 2114.67,1009.03 2114.67,960.97 2104.89,951.19 2099.89,951.19 R16.2@2083.71,935
NetR17_2: R17.2 RX1.A | length 111
  Top Layer w6: RX1.A@2260,1082.48 v4(2260,1155)
  Bottom Layer w10: R17.2 v4(2260,1155)
NetR18_2: R18.2 TX1.A | length 244.2
  Top Layer w6: TX1.A 2233.77,1048.75 2233.77,1160.59 2260,1186.82 v1(2260,1210)
  Bottom Layer w10: R18.2 v1(2260,1210)
NetR19_2: R19.2 U4.6 | length 284.7
  Bottom Layer w7: U4.6 1918.44,1031.44 1918.44,1021.04 1933.03,1006.44 1970.29,1006.44 1981.43,995.31 1981.43,918.68 2019.11,881 2079.5,881 R19.2
NetRX1_C: RX1.C U4.11 | length 392.3
  Top Layer w6: v1(2038,940) 2218.16,940 2283.27,1005.11 2283.27,1038.79 RX1.C
  Bottom Layer w7: U4.11 v1@2032.84,945.16
NetTX1_C: TX1.C U4.5 | length 1126
  Top Layer w6: TX1.C v1(2365,1025)
  Bottom Layer w6: U4.5 1895.47,1021.5 1874.06,1000.09 1874.06,867.31 1882.47,858.89 1882.47,819.14 1901.5,800.12 1901.5,785.27 1915.27,771.5 1934.73,771.5 1948.5,785.27 1999.73,785.27 2050,735 2151.96,735 2188.81,698.15 2283.71,698.15 2289.57,704.01 2289.57,771.47 2342.72,824.62 2342.72,869.48 2393.5,920.27 2393.5,986.5 2365,1015 v1(2365,1025)
NRST: C5.1 C14.2 P7.5 R6.2 S1.B U2.4 | length 43.5
  Bottom Layer w7: C14.2 v1(2150,825)
PWR_ON: P6.2 U2.7
RAIL+: 31.1 BAT1.+ C17.1 C21.1 C23.1 C24.1 C30.1 D2.C Q1.D Q2.D Q3.D Q4.D Q5.D R25.1 R26.1 U5.1 U6.1 U7.1 U8.1 U12.6 | length 9621.7
  Top Layer w15: D2.C D2.C@373.15,236.5 ; C23.1 635,2157.64 567.36,2090 U7.1 489.49,1560.51 Q2.D ; Q5.D Q5.D@859.38,350 ; C24.1@1330,2158.5 1261.5,2090 U8.1 1179.49,1420.51 Q3.D ; C30.1 1921.5,152.72 R26.1
  Top Layer w30: Q4.D 280,329.65 D2.C ; D2.C@373.15,236.5 R25.1 514.65,236.5 U12.6@534.41,256.26 ; BAT1.+ 1379.69,545 1500.12,665.43 1599.88,665.43 1670.43,594.88 1670.43,403.79 C30.1 2213.43,529.21 31.1
  Bottom Layer w10: U6.1 839.57,2471.58 839.57,2500.74 860,2521.16 C21.1 ; U5.1 U5.1@1248.5,876.5
  Bottom Layer w15: C17.1 U5.1@1248.5,876.5
  Bottom Layer w30: U6.1 780.16,1819.84 Q3.D
  Bottom Layer w50: Q4.D Q4.D@280.39,350 ; Q2.D Q2.D@830.39,1220
  Bottom Layer w90: U5.1 1240,1060 1250,1070
  Bottom Layer w200: 280,1114.33 319.76,1074.57 790.24,1074.57 ; 332.16,512.16 285,465 289.33,465 334.33,510 ; 334.33,1060 334.33,510 ; 365,545 BAT1.+ ; 830,455.67 775.67,510 334.33,510 ; 869.76,1074.57 830,1114.33 790.24,1074.57 ; 1250,1070 790.24,1074.57 ; 1329.57,1059.57 1380,1110
SHORE+: C29.1 D3.C Q4.S Q5.S R24.1 SP1.+ U12.4 | length 2620.8
  Top Layer w15: U12.4 643.74,256.26 v1(645,255) ; R24.1 885.64,35 919.82,69.19 987.93,69.19 D3.C
  Top Layer w30: C29.1 1058.74,216.38 D3.C 1090.99,140 1200.12,30.87 1299.88,30.87 1429.57,160.57 1429.57,271.72 1550,392.15 SP1.+
  Bottom Layer w150: 957.98,322.02 957.98,222.02 975.43,204.57 1119.02,348.15 1347.91,348.15
  Bottom Layer w200: 425.43,300 574.33,300 ; 632.16,242.16 669.76,204.57 975.43,204.57 ; 1347.91,348.15 1353.15,348.15 SP1.+
SUBBUS_RXI: RX2.A U2.10 U3.1 | length 112.6
  Top Layer w10: RX2.A 2237.52,2333.27 U3.1
SUBBUS_TE: R9.1 TE1.A U2.8 U3.3 | length 386
  Top Layer w10: U3.3 2263.73,2267.69 2226.25,2267.69 2209.77,2284.17 2209.77,2425.72 2237.52,2453.47 TE1.A 2274.73,2427.79 2274.73,2384.28 2283.5,2375.51 R9.1
SUBBUS_TXO: TX2.A U2.9 U3.4 | length 450.4
  Top Layer w10: v1(2225,2235) 2235.32,2245.32 U3.4 ; TX2.A 2237.52,2527.52 v1(2270,2560)
  Bottom Layer w10: v1(2225,2235) 2225,2268.94 2209.81,2284.12 2209.81,2403.8 2226.5,2420.49 2226.5,2516.5 v1(2270,2560)
SWCLK: P7.2 U2.28
SWDIO: P7.4 U2.25
SWO: P7.6 U2.30
TEMP_AMB: U1.2 U2.13
TEMP_HOTSWAP: P2.1 U2.14
TEMP_MOTFET: P3.1 U2.15
U3V3: C15.1 R17.1 R18.1 U4.1 U4.8 U4.9 | length 326.9
  Top Layer w7: v4(2170,1065) v4@2174,1061
  Bottom Layer w7: C15.1@1795,913.5 1833.31,913.5 U4.1@1845,925.2 ; v1(1845,895) U4.1@1845,925.2 ; U4.1 U4.1@1845,925.2 ; U4.8@1959.53,1034.72 1973.81,1020.44 1999.56,1020.44 v4(2000,1020) 2009.72,1010.28 U4.9@2009.72,984.53 ; R18.1 R17.1 2158.5,1076.5 v4(2170,1065)
pads on no net: P5.1 P5.2 P8. P8.4 U2.3 U2.16 U2.20 U2.29 U2.37 U3.5 U3.9 U7.6 U7.7 U7.8 U8.6 U8.7 U8.8 U9.10 U9.13 U11.10 U11.13
copper on no net:
  other v2: 1872.76,1172.76 1920,1172.76 1967.24,1172.76 1872.76,1220 1920,1220 1967.24,1220 1872.76,1267.24 1920,1267.24 1967.24,1267.24

## Polygon pours and split planes (outlines as drawn)
3V3 on Internal Plane 2 (split plane): 2479.9,25.06 20.1,20.14 20.1,2979.9 2479.9,2979.9
GND on InternalPlane1 (split plane): 2479.9,25.06 20.1,20.14 20.1,2979.9 2479.9,2979.9